# Altium PCB Sensor.PcbDoc
Units mm, origin at the board's own origin, x right, y up, seen from the top; angles counter-clockwise.
Board outline 35 x 15 mm, 4 copper layers (Top Layer 1, Top Layer 2, Bottom Layer 3, Bottom Layer 4), stack 0.603 mm thick; 64 components, 54 nets, 226 pads, 89 vias.
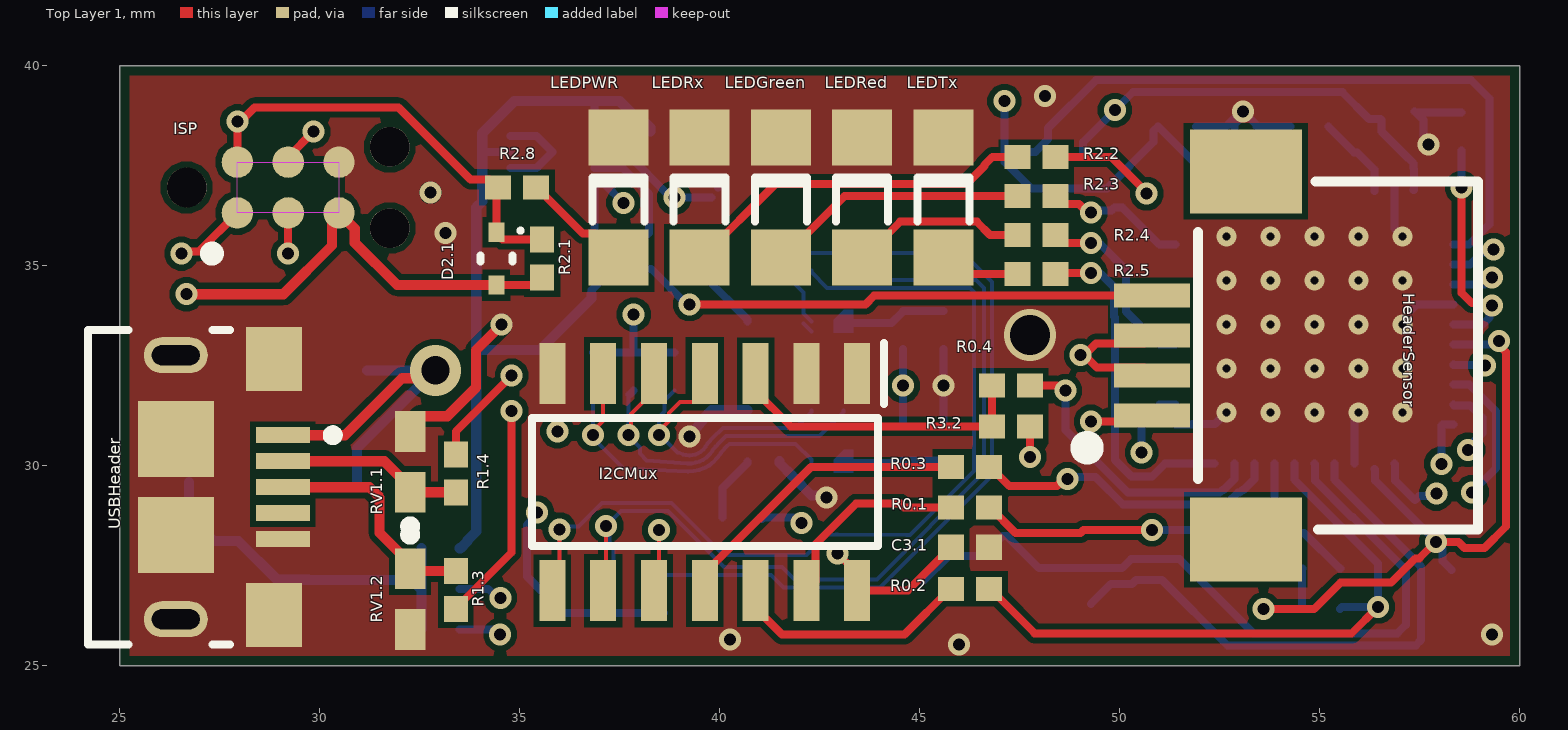
[diagram p0: Top Layer 1 view]
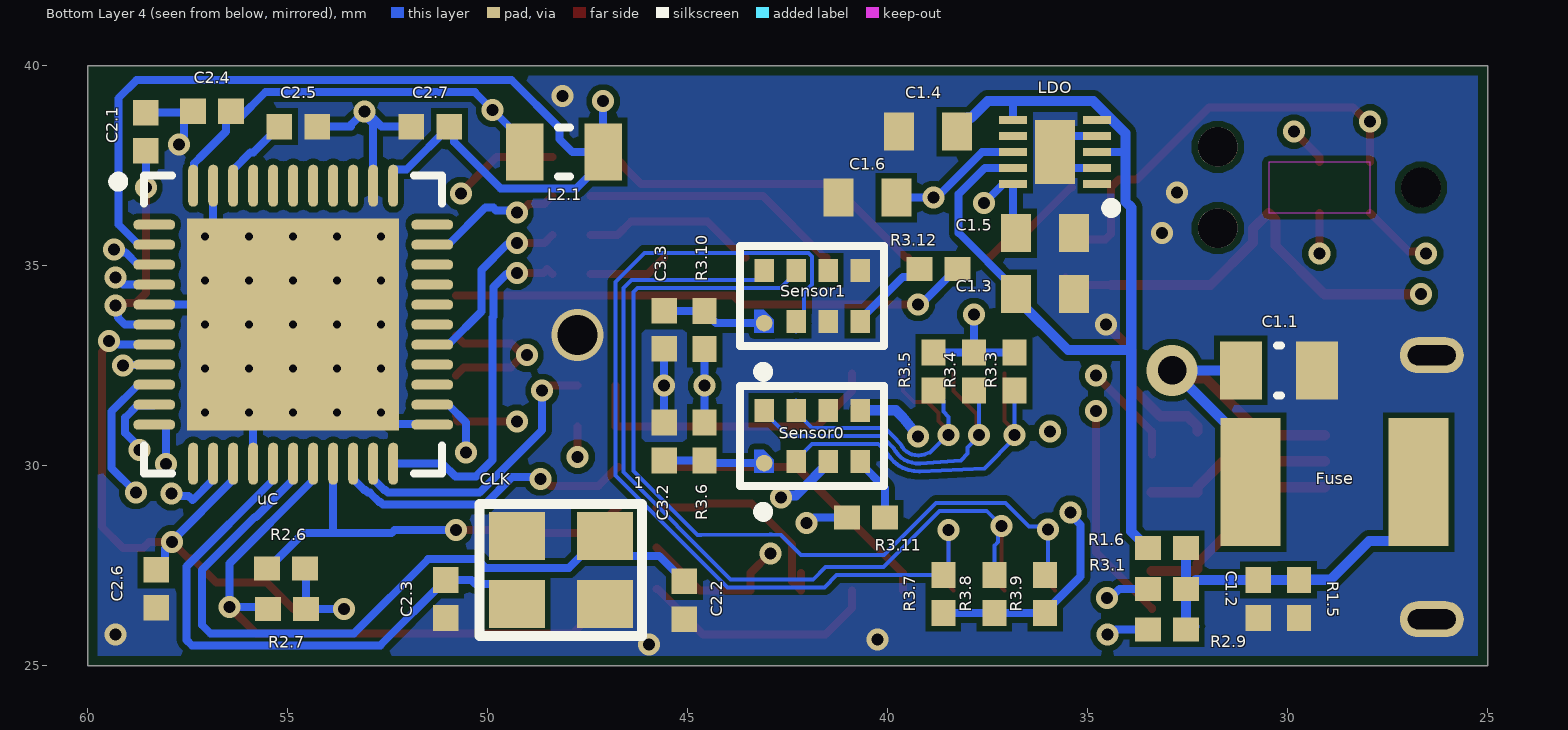
[diagram p1: Bottom Layer 4 view, seen from below]
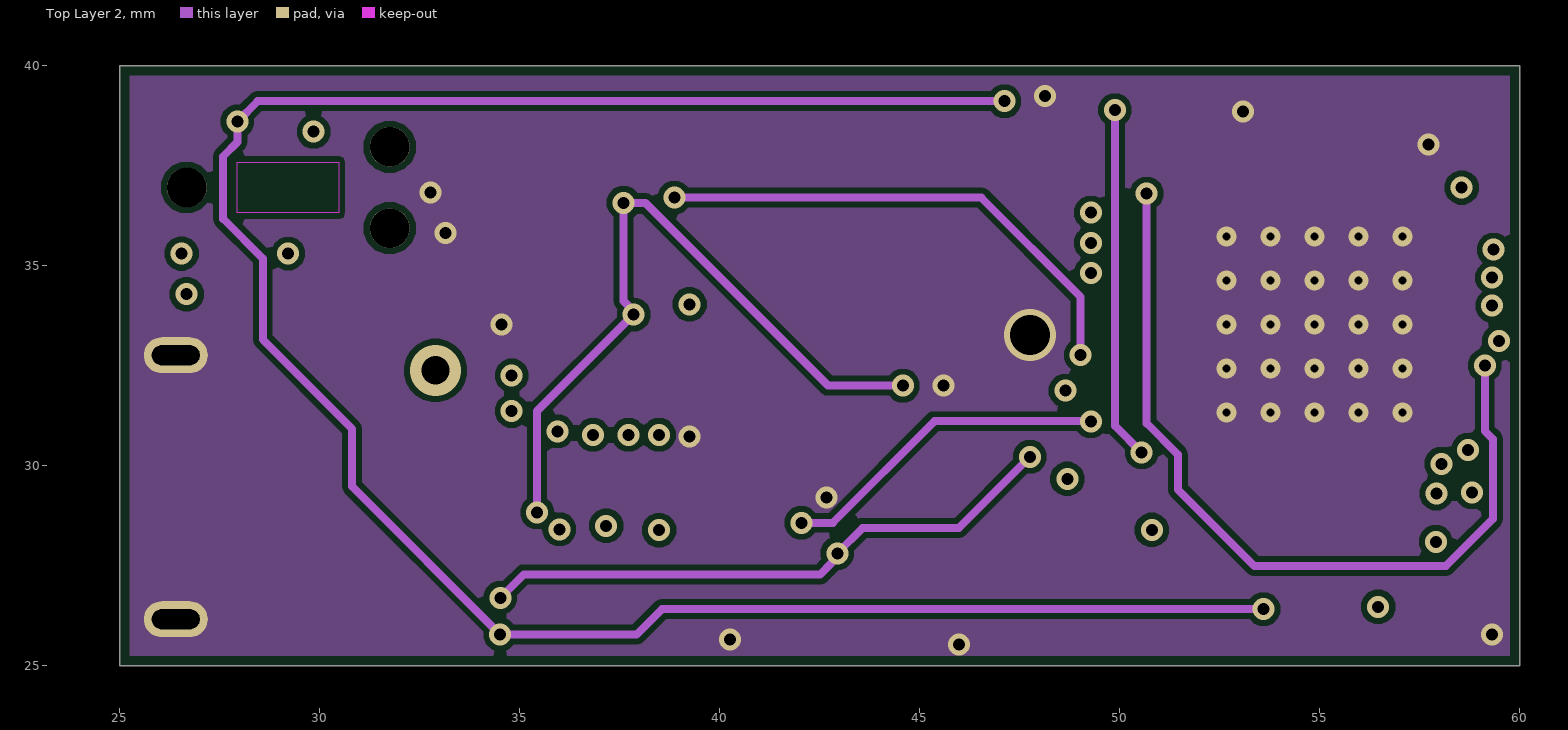
[diagram p2: Top Layer 2]
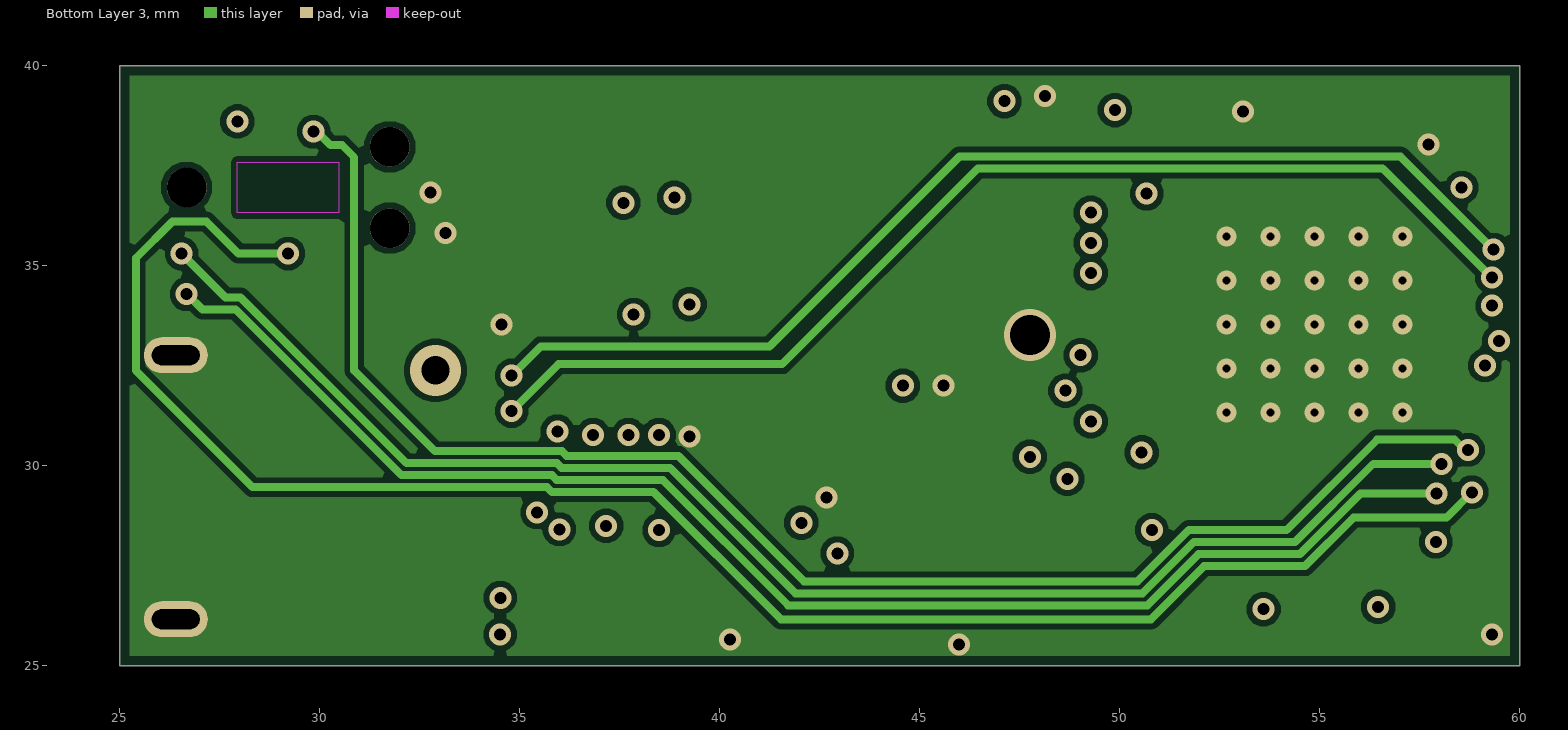
[diagram p3: Bottom Layer 3]
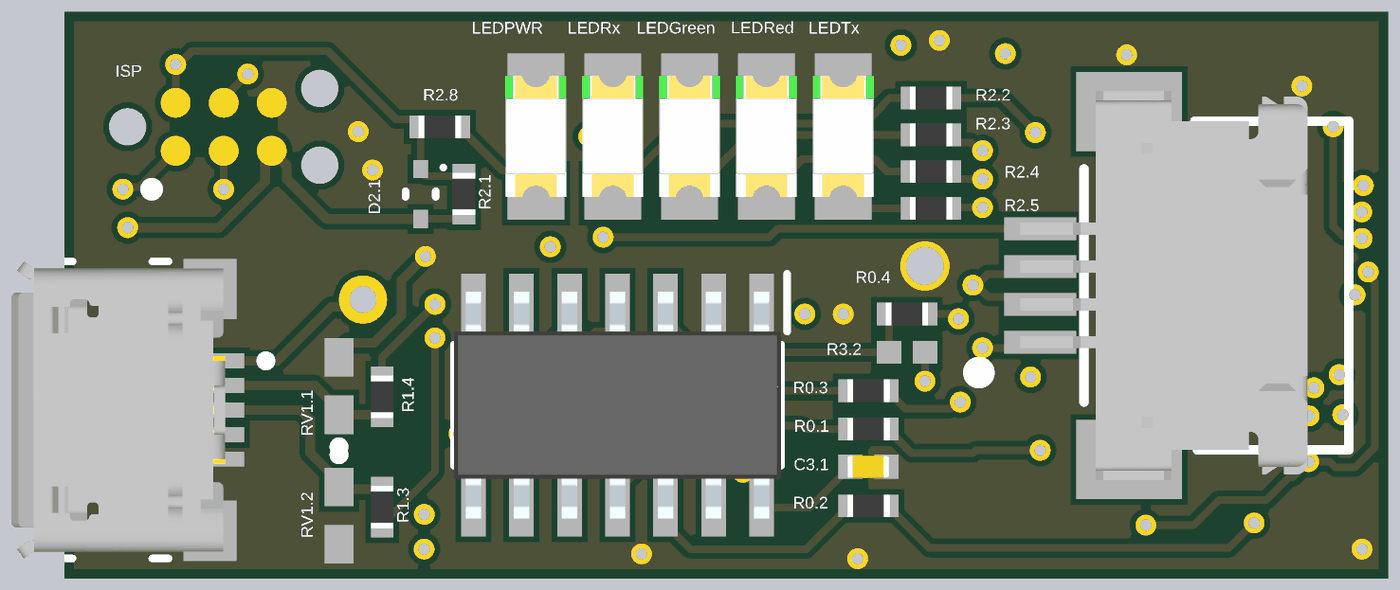
[diagram p4: 3D render of the assembled board from above, using the file's embedded part models]
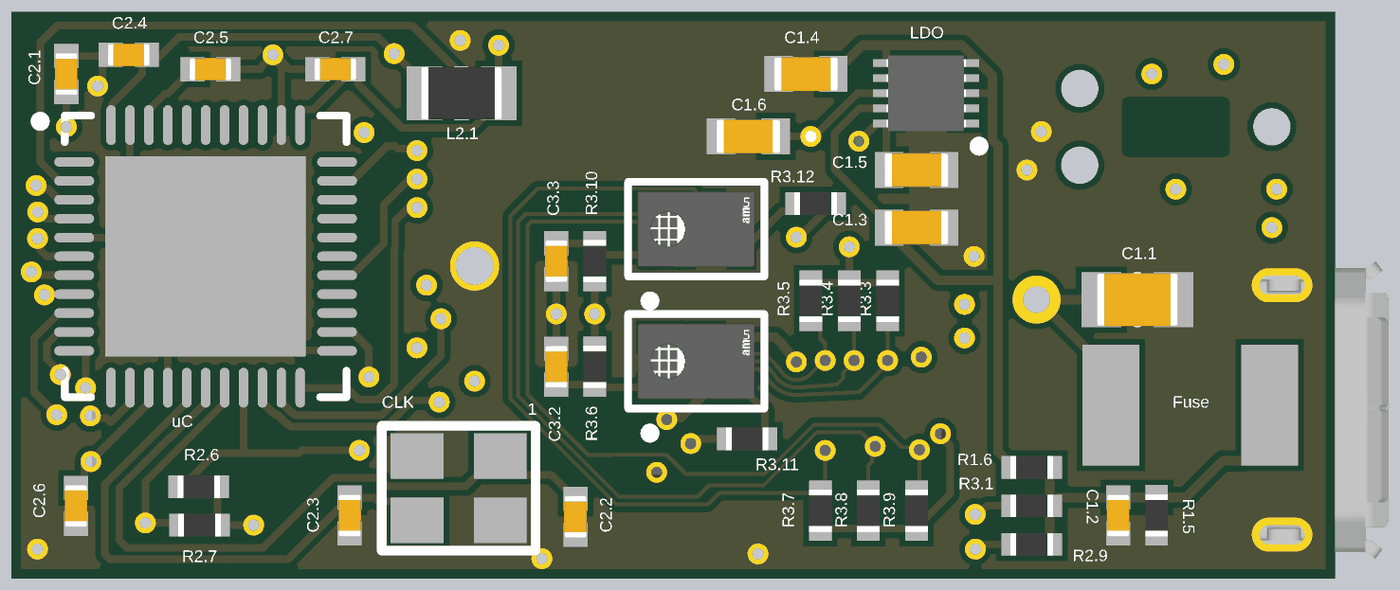
[diagram p5: 3D render of the assembled board from below, using the file's embedded part models]

## Layer stack, top to bottom
Top Solder: solder mask 0.0102, Solder Resist, Dk 3.5
Top Layer 1: signal copper 0.035
Dielectric 2: prepreg 0.0711, PP-006, Dk 4.1
Top Layer 2: signal copper 0.0356
Dielectric 1: dielectric 0.32, FR-4, Dk 4.8
Bottom Layer 3: signal copper 0.0356
Dielectric 3: prepreg 0.0711, PP-006, Dk 4.1
Bottom Layer 4: signal copper 0.035
Bottom Solder: solder mask 0.0102, Solder Resist, Dk 3.5

## Board outline
25,25 25,40 60,40 60,25

## Design rules (kind name [scope] priority, off if disabled: settings)
BoardOutlineClearance [All] p1: gap=0.25 ignorepadtopadclearanceinfootprint=FALSE except(0: Arc-SplitContinuation Track-SplitContinuation SMDPad-SplitContinuation THPad-SplitContinuation Via-SplitContinuation Fill-SplitContinuation Poly-SplitContinuation Region-SplitContinuation Text-SplitContinuation)
Clearance Clearance-xPP-xTP-xTT [All] p1: gap=0.15 ignorepadtopadclearanceinfootprint=FALSE except(0: Arc-Hole Track-Hole SMDPad-Hole THPad-Hole Via-Hole Fill-Hole Poly-Hole Region-Hole Text-Hole; 0.1: Arc-Arc Arc-Track Arc-SMDPad Arc-THPad Track-Track Track-SMDPad Track-THPad SMDPad-SMDPad SMDPad-THPad THPad-THPad)
ComponentClearance [All] p1: gap=0.25 collisioncheckmode=3 verticalgap=0.25 showdistances=FALSE
DiffPairsRouting [All] p1: maxlimit=0.25 minlimit=0.25 mostfreqgap=0.25 toplayer_minwidth=0.381 toplayer_maxwidth=0.381 toplayer_prefwidth=0.381 midlayer1_minwidth=0.381 midlayer1_maxwidth=0.381 midlayer1_prefwidth=0.381 midlayer2_minwidth=0.381 midlayer2_maxwidth=0.381 midlayer2_prefwidth=0.381 bottomlayer_minwidth=0.381 bottomlayer_maxwidth=0.381 bottomlayer_prefwidth=0.381 maxuncoupledlength=12.5
Height [All] p1: minheight=0 maxheight=25 prefheight=12.5
HoleSize HoleSize-PTH [All] p1: absolutevalues=TRUE maxlimit=2 minlimit=0.2 maxpercent=80.000 minpercent=20.000
HoleToHoleClearance [All] p1: gap=0.35 allowstackedmicrovias=TRUE
MinimumAnnularRing "Minimum IAR  >0.45mm" [((ObjectKind = 'Pad') OR (ObjectKind = 'Via')) And (Layer = 'MultiLayer') And (HoleDiameter > AsMM(0.45))] p1: minimumring=0.124 // minimum inner annular ring for pads > 0.45mm finished hole size
MinimumAnnularRing "Minimum IAR <=0.45mm" [((ObjectKind = 'Pad') OR (ObjectKind = 'Via')) And (Layer = 'MultiLayer') And (HoleDiameter <= AsMM(0.45))] p2: minimumring=0.124 // minimum inner annular ring for pads <= 0.45mm finished hole size
MinimumSolderMaskSliver [All] p1: minsoldermaskwidth=0.08
PlaneClearance PlaneClearance-IPI [All] p1: clearance=0.25
PlaneConnect [All] p1: planeconnectstyle=Direct reliefexpansion=0.175 reliefentries=4 reliefconductorwidth=0.2 reliefairgap=0.2
PolygonConnect PolygonConnect-xTW [All] p1: connectstyle=Direct reliefconductorwidth=0.2 reliefentries=4 polygonreliefangle="90 Angle" airgapwidth=0.2
RoutingCorners [All] p1: cornerstyle=45-Degree minsetback=2.5 maxsetback=2.5
RoutingVias "RoutingVias > 0.45mm" [(ObjectKind = 'Via') And (HoleDiameter > AsMM(0.45))] p1: holewidth=0.5 width=0.85 viastyle="Through Hole" minholewidth=0.5 minwidth=0.85 maxholewidth=0.9 maxwidth=1.25 // finishet hole size > 0.45mm
RoutingVias "RoutingVias <= 0.45mm" [(ObjectKind = 'Via') And (HoleDiameter <= AsMM(0.45))] p2: holewidth=0.3 width=0.65 viastyle="Through Hole" minholewidth=0.25 minwidth=0.6 maxholewidth=0.45 maxwidth=0.8 // finishet hole size <= 0.45mm
SilkToSilkClearance [All] p1: silktosilkclearance=0.2
SilkToSolderMaskClearance SilkscreenOverComponentPads [IsPad] p1: minsilkscreentomaskgap=0.2 clearancetoexposedcopper=TRUE
SolderMaskExpansion [All] p1: expansion=0 istentingtop=FALSE
UnRoutedNet [All] p1: checkbadconnections=TRUE
Width Width-xTW [All] p1: maxlimit=3 minlimit=0.1 preferedwidth=0.2 minimp=50.000000 maximp=50.000000 favimp=50.000000
18 further rules are at their usual default settings.

## Classes and differential pairs
component class U_USB: C1.1 C1.2 C1.3 C1.4 C1.5 C1.6 Fuse LDO R1.3 R1.4 R1.5 R1.6 RV1.1 RV1.2 USBHeader
component class U_Sensors: C3.1 C3.2 C3.3 HeaderSensor I2CMux R3.1 R3.2 R3.3 R3.4 R3.5 R3.6 R3.7 R3.8 R3.9 R3.10 R3.11 R3.12 Sensor0 Sensor1
component class U_ATMega32U4: C2.1 C2.2 C2.3 C2.4 C2.5 C2.6 C2.7 CLK D2.1 ISP L2.1 LEDGreen LEDPWR LEDRed LEDRx LEDTx R2.1 R2.2 R2.3 R2.4 R2.5 R2.6 R2.7 R2.8 R2.9 uC
component class Main: R0.1 R0.2 R0.3 R0.4

## Components (designator, comment, footprint, x,y, rotation, side; value= is the part's Value field where it differs from the comment)
C1.1 "0805" C0805_M 30.226,32.385 r0 bottom value=22u
C1.2 "0402" C0402_M 30.734,26.67 r90 bottom value=100n
C1.3 "0603" C0603_M 36.068,34.29 r0 bottom value=10u
C1.4 "0603" C0603_M 38.989,38.354 r180 bottom value=10u
C1.5 "0603" C0603_M 36.068,35.814 r0 bottom value=10u
C1.6 "0603" C0603_M 40.513,36.703 r180 bottom value=10u
C2.1 "0402" C0402_M 58.547,38.354 r90 bottom value=1u
C2.2 "0402" C0402_M 45.085,26.637 r90 bottom value=22p
C2.3 "0402" C0402_M 51.054,26.67 r90 bottom value=22p
C2.4 "0402" C0402_M 56.896,38.862 r180 bottom value=1u
C2.5 "0402" C0402_M 54.737,38.481 r180 bottom value=100n
C2.6 "0402" C0402_M 58.293,26.924 r90 bottom value=100n
C2.7 "0402" C0402_M 51.435,38.481 r180 bottom value=100n
C3.1 "0402" C0402_M 46.256,27.96 r180 top value=100n
C3.2 "0402" C0402_M 45.593,30.607 r90 bottom value=100n
C3.3 "0402" C0402_M 45.593,33.401 r270 bottom value=100n
CLK "7M-16.000MAAE-T" 7M-16.000MAAE-T 48.176,27.393 r0 bottom
D2.1 "NSV1SS400T1G" ONSC-SOD-523-2-502-01_V 34.417,35.179 r270 top
Fuse "MF-MSMF050-2" BOUR-MF-MSMF050-2_V 28.829,29.591 r180 bottom
HeaderSensor "52207-0433" 52207-0433 50.8,32.758 r90 top
I2CMux "" SOIC127P600X175-14N 39.624,29.591 r270 top
ISP "" TAG_TC2030-IDC-NL 29.21,36.957 r0 top
L2.1 "MH2029-300Y" L0805_M 48.097,37.846 r180 bottom value=100n
LDO "TLV751180330PDSQR" SON40P200X200X80-11N 35.814,37.846 r0 bottom
LEDGreen "150120GS75000" 1206_A 41.529,36.703 r270 top
LEDPWR "150120BS75000" 1206_A 37.465,36.703 r270 top
LEDRed "150120RS75000" 1206_A 43.561,36.703 r270 top
LEDRx "150120YS75000" 1206_A 39.497,36.703 r270 top
LEDTx "150120YS75000" 1206_A 45.593,36.703 r270 top
R0.1 "0402" R0402_M 46.261,28.956 r180 top value=0R
R0.2 "0402" R0402_M 46.261,26.924 r180 top value=0R
R0.3 "0402" R0402_M 46.261,29.972 r180 top value=0R
R0.4 "0402" R0402_M 47.277,32.004 r180 top value=0R
R1.3 "0402" R0402_M 33.401,26.891 r270 top value=22R
R1.4 "0402" R0402_M 33.401,29.812 r90 top value=22R
R1.5 "0402" R0402_M 29.718,26.675 r90 bottom value=10k
R1.6 "0402" R0402_M 33.02,27.94 r180 bottom value=0R
R2.1 "0402" R0402_M 35.56,35.179 r90 top value=10k
R2.2 "0402" R0402_M 47.912,37.719 r180 top value=1k
R2.3 "0402" R0402_M 47.912,36.745 r0 top value=1k
R2.4 "0402" R0402_M 47.912,35.772 r0 top value=1k
R2.5 "0402" R0402_M 47.912,34.798 r0 top value=1k
R2.6 "0402" R0402_M 55.047,27.432 r180 bottom value=4K7
R2.7 "0402" R0402_M 55.024,26.416 r180 bottom value=4K7
R2.8 "0402" R0402_M 34.925,36.957 r180 top value=1k
R2.9 "0402" R0402_M 33.02,25.908 r180 bottom value=0R
R3.1 "0402" R0402_M 33.02,26.924 r0 bottom value=0R
R3.2 "0402" R0402_M_open 47.277,30.988 r180 top value=0R
R3.3 "0402" R0402_M 36.83,32.352 r90 bottom value=2k2
R3.4 "0402" R0402_M 37.846,32.352 r90 bottom value=2k2
R3.5 "0402" R0402_M 38.862,32.352 r90 bottom value=2k2
R3.6 "0402" R0402_M 44.577,30.607 r270 bottom value=0R
R3.7 "0402" R0402_M 38.608,26.797 r270 bottom value=2k2
R3.8 "0402" R0402_M 37.338,26.797 r270 bottom value=2k2
R3.9 "0402" R0402_M 36.068,26.797 r270 bottom value=2k2
R3.10 "0402" R0402_M 44.577,33.401 r90 bottom value=0R
R3.11 "0402" R0402_M 40.546,28.702 r180 bottom value=10R
R3.12 "0402" R0402_M 38.735,34.925 r180 bottom value=10R
RV1.1 "CG0603MLC-05E" BOUR-CG0603-2_V 32.258,30.097 r90 top
RV1.2 "CG0603MLC-05E" BOUR-CG0603-2_V 32.258,26.668 r270 top
Sensor0 "AS7341-DLGM" FP-AS7341-DLGM-MFG 41.891,30.75 r90 bottom
Sensor1 "AS7341-DLGM" FP-AS7341-DLGM-MFG 41.891,34.25 r90 bottom
uC "ATmega32U4-MU" 44PW_M 54.864,33.528 r180 bottom
USBHeader "10118193-0001LF" FCI-10118193-0001LF-5_V 27.75,29.464 r270 top

## Footprints (in the part's own frame and the unit in brackets; to place one, negate y for a bottom-side part, rotate by r counter-clockwise, add the part's x,y. Pads: shape width x height; smd on the part's side, far side on the other; paste and mask are expansions set on the pad)
7M-16.000MAAE-T [mm]
  rect 1.4x1.2 smd: 1(-1.1,-0.85) 2(1.1,-0.85) 3(1.1,0.85) 4(-1.1,0.85)
  silkscreen extent -2.03,-1.65 2.03,1.65
44PW_M [mm] "QFN, 44-Leads, Body 7x7mm, Pitch 0.5mm, Thermal Pad 5.3x5.3mm, IPC Low Density"
  oval 1.05x0.25 smd: 1(-3.475,2.5) 2(-3.475,2) 3(-3.475,1.5) 4(-3.475,1) 5(-3.475,0.5) 6(-3.475,0) 7(-3.475,-0.5) 8(-3.475,-1) 9(-3.475,-1.5) 10(-3.475,-2) 11(-3.475,-2.5) 23(3.475,-2.5) 24(3.475,-2) 25(3.475,-1.5) 26(3.475,-1) 27(3.475,-0.5) 28(3.475,0) 29(3.475,0.5) 30(3.475,1) 31(3.475,1.5) 32(3.475,2) 33(3.475,2.5)
  oval 0.25x1.05 smd: 12(-2.5,-3.475) 13(-2,-3.475) 14(-1.5,-3.475) 15(-1,-3.475) 16(-0.5,-3.475) 17(0,-3.475) 18(0.5,-3.475) 19(1,-3.475) 20(1.5,-3.475) 21(2,-3.475) 22(2.5,-3.475) 34(2.5,3.475) 35(2,3.475) 36(1.5,3.475) 37(1,3.475) 38(0.5,3.475) 39(0,3.475) 40(-0.5,3.475) 41(-1,3.475) 42(-1.5,3.475) 43(-2,3.475) 44(-2.5,3.475)
  rect 5.3x5.3 smd: 45(0,0)
  silkscreen extent -4.5,-3.73 3.73,3.73, body extent -3.57,-3.58 3.58,3.57, height 0.9
1206_A [mm] "Chip LED, 2-Leads, Body 3.2x1.6mm, IPC Medium Density"
  rect 1.4x1.5 smd: 1(-1.5,0) 2(1.5,0)
  silkscreen extent -0.5,-0.66 0.6,0.65, body extent -1.6,-0.8 1.6,0.8, height 0.68
52207-0433 [mm]
  rect 0.6x1.9 smd: 1(-1.5,0) 2(-0.5,0) 3(0.5,0) 4(1.5,0)
  rect 2.1x2.8 smd: 5(-4.605,-2.35) 6(4.605,-2.35)
  silkscreen extent -4.35,-8.16 4.35,1.79, body extent -5.15,-7.07 5.15,0.53, height 2.7
BOUR-CG0603-2_V [mm] "SMD, 2-Leads, Body 1.6x0.8mm, Pitch 1.52mm"
  rect 1.02x0.76 smd: 1(-0.76,0) 2(0.76,0)
  silkscreen extent -1.94,-0.13 -1.7,0.12, body extent -0.8,-0.4 0.8,0.4, height 0.55
BOUR-MF-MSMF050-2_V [mm] "SMD, 2-Leads, Body 4.55x3.24mm"
  rect 1.5x3.2 smd: 1(-2.1,0) 2(2.1,0)
  body extent -2.28,-1.62 2.28,1.62, height 0.85
C0402_M [mm] "Cap 0402(M1005) Medium Density"
  rect 0.64x0.64 smd: 1(-0.475,0) 2(0.475,0)
  body extent -0.56,-0.3 0.56,0.3, height 0.56
C0603_M [mm] "Cap 0603(M1608) Medium Density"
  rect 0.75x0.95 smd: 1(-0.725,0) 2(0.725,0)
  body extent -0.85,-0.45 0.85,0.45, height 0.86
C0805_M [mm] "Cap 0805(M2012) Medium Density"
  rect 1.05x1.45 smd: 1(-0.95,0) 2(0.95,0)
  silkscreen extent -0.05,-0.62 0.05,0.63, body extent -1.07,-0.7 1.08,0.7, height 1.4
FCI-10118193-0001LF-5_V [mm] "Micro, USB-B, 5-Leads, Body 7.86x5.05mm, Pitch 0.65 mm"
  rect 0.4x1.35 smd: 1(-1.3,1.325) 2(-0.65,1.325) 3(0,1.325) 4(0.65,1.325) 5(1.3,1.325)
  rect 1.6x1.4 smd: 6(-3.2,1.1) 7(3.2,1.1)
  rect 1.9x1.9 smd: 8(-1.2,-1.35) 9(1.2,-1.35)
  oval 0.9x1.6 hole 0.5 slot 1.2 at 90 deg: 10(-3.3,-1.35) 11(3.3,-1.35)
  silkscreen extent -3.93,-3.55 3.93,2.7, body extent -3.93,-4.16 3.93,1.5, height 2.83
FP-AS7341-DLGM-MFG [mm]
  round 0.414 smd paste+0 mask+0: 1(-0.681,1.2)
  rect 0.575x0.488 smd paste+0 mask+0: 2(-0.638,0.4) 3(-0.638,-0.4) 4(-0.638,-1.2) 5(0.638,-1.2) 6(0.638,-0.4) 7(0.638,0.4) 8(0.638,1.2)
  Top Layer 1 region: -0.925,1.444 -0.35,1.444 -0.35,1.206 -0.6,0.956 -0.925,0.956 -0.925,1.444
  silkscreen extent -2.02,-1.8 1.25,1.8, body extent -1,-1.55 1,1.55, height 2
L0805_M [mm] "Inductor 0805(M2012) Medium Density"
  rect 0.94x1.43 smd: 1(-0.98,0) 2(0.98,0)
  silkscreen extent -0.15,-0.61 0.15,0.61, body extent -1.07,-0.7 1.08,0.7, height 0.6
ONSC-SOD-523-2-502-01_V [mm] "SOD, 2-Leads, Body 1.2x0.8mm"
  rect 0.48x0.4 smd: 1(-0.66,0) 2(0.66,0)
  silkscreen extent -0.75,-0.4 0.07,0.65, body extent -0.6,-0.4 0.6,0.4, height 0.7
R0402_M [mm] "Res 0402(M1005) Medium Density"
  rect 0.65x0.6 smd: 1(-0.475,0) 2(0.475,0)
  body extent -0.56,-0.3 0.56,0.3, height 0.35
R0402_M_open [mm] "Res 0402(M1005) Open Medium Density"
  rect 0.65x0.6 smd: 1(-0.475,0) 2(0.475,0)
  body extent -0.56,-0.3 0.56,0.3, height 0.35
SOIC127P600X175-14N [mm]
  rect 1.525x0.65 smd: 1(-2.712,3.81) 2(-2.712,2.54) 3(-2.712,1.27) 4(-2.712,0) 5(-2.712,-1.27) 6(-2.712,-2.54) 7(-2.712,-3.81) 8(2.712,-3.81) 9(2.712,-2.54) 10(2.712,-1.27) 11(2.712,0) 12(2.712,1.27) 13(2.712,2.54) 14(2.712,3.81)
  silkscreen extent -3.47,-4.33 1.6,4.48, body extent -3,-4.33 3,4.33, height 1.75
SON40P200X200X80-11N [mm]
  rect 0.7x0.2 smd: 1(-1.05,0.8) 2(-1.05,0.4) 3(-1.05,0) 4(-1.05,-0.4) 5(-1.05,-0.8) 6(1.05,-0.8) 7(1.05,-0.4) 8(1.05,0) 9(1.05,0.4) 10(1.05,0.8)
  rect 1x1.6 smd: 11(0,0)
  silkscreen extent -1.52,1.28 -1.27,1.52, body extent -1.05,-1 1.05,1, height 0.8
TAG_TC2030-IDC-NL [mil]
  round 30.98 smd paste-39.37: 1(-50,-25) 2(-50,25) 3(0,-25) 4(0,25) 5(50,-25) 6(50,25)
  round 39.02 hole 39.02 unplated: ""(-100,0) ""(100,-40) ""(100,40)
  Keep-Out Layer region: 50,-25.03 -50.06,-25.03 -50.06,25 50,25
  Keep-Out Layer region: 50,-25.03 -50.05,-25.03 -50.05,25 50,25
  silkscreen extent -81,-71 -69,-59

## Part data
C1.1: library part C0805_X5R_22u_20%, "Capacitor", Manufactor=Walsin, ManufactorPartNumber=0805X226M6R3CT, Supplier Part Number 1=2497053, TempRating="-55°C to +125°C", Tolerance=20%, VoltageRating=6.3V, Part Number=C0805_X5R_22u_20%, Supplier 1=Farnell, Tech="MLCC X5R", Type=Capacitor
C1.2 C2.5 C2.6 C2.7: library part C0402_X7R_100n_10%, "Capacitor", Manufactor=Yageo, ManufactorPartNumber=CC0402KRX7R7BB104, Supplier Part Number 1=9402047, TempRating="-55°C to +125°C", Tolerance=10%, VoltageRating=16V, Part Number=C0402_X7R_100n_10%, Supplier 1=Farnell, Tech="MLCC X7R", Type=Capacitor
C1.3 C1.4 C1.5 C1.6: library part C0603_X5R_10u_10%, "Capacitor", Manufactor=Yageo, ManufactorPartNumber=CC0603MRX5R5BB106, Supplier Part Number 1=1458902, TempRating="-55°C to +85°C", Tolerance=10%, VoltageRating=6,3V, Part Number=C0603_X5R_10u_10%, Supplier 1=Farnell, Tech="MLCC X5R", Type=Capacitor
C2.1 C2.4: library part C0402_X5R_1u_10V_WE, "Capacitor", Manufactor="WURTH ELEKTRONIK", ManufactorPartNumber=885012105012, Supplier Part Number 1=732-7489-1-ND, TempRating="-55°C to +125°C", Tolerance=±20%, VoltageRating=10V, Part Number=C0402_X5R_1u_10V_WE, Supplier 1=Digi-Key, Tech=X5R, Type=Capacitor
C2.2 C2.3: library part C0402_NP0_22p_50V_WE, "Capacitor", Manufactor="WURTH ELEKTRONIK", ManufactorPartNumber=885012005057, Supplier Part Number 1=732-7471-1-ND, TempRating="-55°C to +125°C", Tolerance=±5%, VoltageRating=50V, Part Number=C0402_NP0_22p_50V_WE, Supplier 1=Digi-Key, Tech=NP0, Type=Capacitor
C3.1 C3.2 C3.3: library part C0402_X5R_100n_10%, "Capacitor", Manufactor=Yageo, ManufactorPartNumber=CC0402KRX5R7BB104, Supplier Part Number 1=1816750, TempRating="-55°C to +85°C", Tolerance=10%, VoltageRating=16V, Part Number=C0402_X5R_100n_10%, Supplier 1=Farnell, Supplier 2=Digi-Key, Supplier Part Number 2=311-1347-1-ND, Tech="MLCC X5R", Type=Capacitor
D2.1: library part CMP-1054-00078-1, "High-Speed Switching Diode, 2-Pin SOD-523, Pb-Free, Tape and Reel", Manufacturer="On Semiconductor", ComponentLink1Description="Manufacturer URL", ComponentLink1URL=http://www.onsemi.com/, ComponentLink2Description=Datasheet, ComponentLink2URL=http://www.onsemi.com/pub_link/Collateral/1SS400T1-D.PDF, ComponentLink3Description="Package Specification", ComponentLink3URL=http://www.onsemi.com/pub_link/Collateral/502-01.PDF, Configuration=Single, DatasheetVersion="Rev. 7", IF Max (A)=0.2, Mounting Technology="Surface Mount", PackageDescription="2-Pin SOD, Body 1.2 x 0.8 mm", PackageReference=SOD-523-2-502-01, PackageVersion="Rev. E, 09/2010", Packing="Tape and Reel", PartNumber=NSV1SS400T1G, RoHS=TRUE, trr Max (ns)=4
Fuse: library part CMP-2100-03653-1, "PTC Resettable Fuse, 15 V, 500 mA, -40 to 85 degC, 2-Pin SMD, RoHS, Tape and Reel", Case Code (Imperial)=1812, Case Code (Metric)=4532, Current Rating=100A, Manufacturer=Bourns, Max Operating Temperature=85degC, Min Operating Temperature=-40degC, Package Description="2-Pin Surface Mount Device, Body 4.55 x 3.24 mm", Package Quantity=2000, Power Dissipation=800mW, Resistance=150mOhm, Supply Voltage=15V, Case/Package=1812, Contact Plating=Gold, Datasheet URL=http://www.bourns.com/docs/Product-Datasheets/mfmsmf.pdf, Datasheet Version="Rev. AG, 08/2016", Height=0.85mm, Lead Free=LeadFree, Length=4.73mm, Manufacturer URL=http://www.bourns.com/, Max Current Rating=100A, Mount=SurfaceMount, Number of Terminals=2, Package Reference=MF-MSMF050-2, Packaging=TapeandReel, Radiation Hardening=No, REACH SVHC=NoSVHC, RoHSCompliant=true, Termination=SMD/SMT, Voltage Rating=15V, Voltage Rating (DC)=15V, Width=3.41mm
HeaderSensor: "Connector", Manufacturer_Name=Molex, Mouser Part Number=538-52207-0433, Datasheet Link=http://www.molex.com/pdm_docs/sd/522072033_sd.pdf, Manufacturer_Part_Number=52207-0433, Mouser Price/Stock=https://www.mouser.co.uk/ProductDetail/Molex/52207-0433?qs=rw2VfpiI%2FsN5C%252BrnOc9sng%3D%3D
I2CMux: library part TCA9543ADR, "Integrated Circuit", Manufacturer_Name="Texas Instruments", Mouser Part Number=595-TCA9543ADR, Arrow Part Number=TCA9543ADR, Arrow Price/Stock=https://www.arrow.com/en/products/tca9543adr/texas-instruments, Datasheet Link=http://www.ti.com/lit/gpn/tca9543a, Height=1.75mm, Manufacturer_Part_Number=TCA9543ADR, Mouser Price/Stock=https://www.mouser.co.uk/ProductDetail/Texas-Instruments/TCA9543ADR/?qs=WuTGPxIYnC6YhvyolILbYg%3D%3D
ISP: library part TC2030-IDC-NL, "6-PIN PLUG-OF-NAILS CABLE 6", Package="Package Analog Devices", Availability=Unavailable, MF=Tag-Connect, MP=TC2030-IDC-NL, Price=None, SnapEDA_Link=https://www.snapeda.com/parts/TC2030-IDC-NL/Tag-Connect/view-part/2783029/?ref=snap
L2.1: library part L0805_100n_2%, CurrentRating=400mA, Manufactor=Coilcraft, ManufactorPartNumber=0805CS-101XJLC, Supplier Part Number 1=2286419, TempRating="-40°C bis 125°C", Tolerance=2%, Kind=General, Part Number=L0805_100n_2%, Supplier 1=Farnell
LDO: "Integrated Circuit", Manufacturer_Name="Texas Instruments", Mouser Part Number=595-LV751180330PDSQR, Arrow Part Number=TLV751180330PDSQR, Arrow Price/Stock=https://www.arrow.com/en/products/tlv751180330pdsqr/texas-instruments, Datasheet Link=https://www.arrow.com/en/products/tlv751180330pdsqr/texas-instruments, Height=0.8mm, Manufacturer_Part_Number=TLV751180330PDSQR, Mouser Price/Stock=https://www.mouser.co.uk/ProductDetail/Texas-Instruments/TLV751180330PDSQR/?qs=TiOZkKH1s2TTHzmF98psZw%3D%3D
LEDGreen: library part CMP-1426-00014-1, "SMD mono-color Chip LED, WL-SMCW, Green", Color=Green, Manufacturer="Wuerth Elektronik", ComponentLink1Description="Manufacturer URL", ComponentLink1URL=http://www.we-online.com, ComponentLink2Description=Datasheet, ComponentLink2URL=http://katalog.we-online.com/led/datasheet/150120GS75000.pdf, PackageReference=1206_A, PartNumber=150120GS75000
LEDPWR: library part CMP-1426-00015-1, "SMD mono-color Chip LED, WL-SMCW, Blue", Color=Blue, Manufacturer="Wuerth Elektronik", ComponentLink1Description="Manufacturer URL", ComponentLink1URL=http://www.we-online.com, ComponentLink2Description=Datasheet, ComponentLink2URL=http://katalog.we-online.com/led/datasheet/150120BS75000.pdf, PackageReference=1206_A, PartNumber=150120BS75000
LEDRed: library part CMP-1426-00013-1, "SMD mono-color Chip LED, WL-SMCW, Red", Color=Red, Manufacturer="Wuerth Elektronik", ComponentLink1Description="Manufacturer URL", ComponentLink1URL=http://www.we-online.com, ComponentLink2Description=Datasheet, ComponentLink2URL=http://katalog.we-online.com/led/datasheet/150120RS75000.pdf, PackageReference=1206_A, PartNumber=150120RS75000
LEDRx LEDTx: library part CMP-1426-00019-1, "SMD mono-color Chip LED, WL-SMCW, Yellow", Color=Yellow, Manufacturer="Wuerth Elektronik", ComponentLink1Description="Manufacturer URL", ComponentLink1URL=http://www.we-online.com, ComponentLink2Description=Datasheet, ComponentLink2URL=http://katalog.we-online.com/led/datasheet/150120YS75000.pdf, PackageReference=1206_A, PartNumber=150120YS75000
R0.1 R0.2 R0.3 R0.4 R1.6 R2.9 R3.1: library part R0402_1%_0R, "Resistor", Manufactor=Multicomp, ManufactorPartNumber=MC00625W040210R, PowerRating=0,0625W, Supplier Part Number 1=1357983, Tolerance=1%, VoltageRating=50V, Part Number=R0402_1%_0R, Supplier 1=Farnell, Tech=Dickschicht, Type=Resistor
R1.3 R1.4: library part R0402_1%_220R, "Resistor", Manufactor=Vishay, ManufactorPartNumber=CRCW0402220RFKEDHP, PowerRating=0,125W, Tolerance=1%, VoltageRating=50V, Part Number=R0402_1%_220R, Tech=Dickschicht, Type=Resistor
R1.5 R2.1: library part R0402_1%_10k, "Resistor", Manufactor=Vishay, ManufactorPartNumber=CRCW040210K0FKEDHP, PowerRating=0,125W, Supplier Part Number 1=541-10.0KYCT-ND, Tolerance=1%, VoltageRating=50V, Part Number=R0402_1%_10k, Supplier 1=Digi-Key, Supplier 2=Farnell, Supplier Part Number 2=1738864, Tech=Dickschicht, Type=Resistor
R2.2 R2.3 R2.4 R2.5 R2.8: library part R0402_1%_1k, "Resistor", Manufactor=Vishay, ManufactorPartNumber=CRCW04021K00FKED, PowerRating=0,063W, Supplier Part Number 1=541-1.00KLCT-ND, Tolerance=1%, VoltageRating=50V, Part Number=R0402_1%_1k, Supplier 1=Digi-Key, Supplier 2=Farnell, Supplier Part Number 2=1469662, Tech=Dickschicht, Type=Resistor
R2.6 R2.7: library part R0402_1%_3k3, "Resistor", Manufactor=Yageo, ManufactorPartNumber=RC0402FR-073K3L, PowerRating=0,0625W, Tolerance=1%, VoltageRating=50V, Part Number=R0402_1%_3k3, Tech=Dickschicht, Type=Resistor
R3.2: library part Res0402open, "Resistor", Part Number=Res0402open, Type=Resistor
R3.3 R3.4 R3.5 R3.7 R3.8 R3.9: library part R0402_1%_1k, "Resistor", Manufactor=Vishay, ManufactorPartNumber=CRCW04021K00FKED, PowerRating=0,063W, Tolerance=1%, VoltageRating=50V, Part Number=R0402_1%_1k, Tech=Dickschicht, Type=Resistor
R3.6 R3.10: library part R0402_0R, "Resistor", Manufactor=Yageo, ManufactorPartNumber=RC0402JR-070RL, PowerRating=0,0625W, Supplier Part Number 1=311-0.0JRCT-ND, Tolerance=1%, VoltageRating=50V, Part Number=R0402_0R, Supplier 1=Digi-Key, Tech=Dickschicht, Type=Resistor
R3.11 R3.12: library part R0402_1%_100R, "Resistor", Manufactor=Vishay, ManufactorPartNumber=CRCW0402100RFKEDHP, PowerRating=0,125W, Tolerance=1%, VoltageRating=50V, Part Number=R0402_1%_100R, Tech=Dickschicht, Type=Resistor
RV1.1 RV1.2: library part CMP-0584-00001-2, "ESD Protector, 5 V Supply, -40 to 85 degC, 1.6 x 0.8 x 0.55 mm SMD, RoHS, Tape and Reel", Manufacturer=Bourns, Operating Temperature="-40 to 85 degC", CO="0.5 pF", ComponentLink1Description="Manufacturer URL", ComponentLink1URL=http://www.bourns.com/, ComponentLink2Description=Datasheet, ComponentLink2URL=http://www.bourns.com/data/global/pdfs/MLC.pdf, DatasheetVersion="Rev. S", Mounting Technology="Surface Mount", PackageDescription="2-Pin SMD, Body 1.6 x 0.8 mm, Pitch 1.52 mm", PackageReference=CG0603-2, Packing="Tape and Reel", PartNumber=CG0603MLC-05E, RoHS=TRUE, RT="1 ns", VC="20 V", VDC="5 V", VT="150 V"
Sensor0 Sensor1: library part CMP-22831-000004-1, "SENSOR AMBIENT LIGHT"
uC: library part CMP-0095-00166-2, "8-bit AVR Microcontroller, 2.7-5.5V, 16MHz, 32KB Flash, 1KB EEPROM, 2.5KB SRAM, USB Controller, 44-pin QFN, Industrial Grade (-40°C to 85°C), Ext Osc", Code_JEDEC=MO-220-VKKD-1, ComponentLink1Description="Manufacturer URL", ComponentLink1URL=http://www.atmel.com/, ComponentLink2Description="ATmega16U4/32U4 Datasheet", ComponentLink2URL=http://www.atmel.com/dyn/resources/prod_documents/doc7766.pdf, ComponentLink3Description="ATmega16U4 ATmega32U4 Summary", ComponentLink3URL=http://www.atmel.com/dyn/resources/prod_documents/7766S.pdf, DatasheetVersion="revF, Nov-2010", PackageDescription="44-Pin Quad Flat No-Lead Package, 7 x 7 mm Body, 0.5 mm Pitch (QFN)", PackageReference=44PW, PackageVersion="revG, Sep-2009", RevisionNote="DatasheetVersion, PackageVersion & PCB updated. URLs added."
USBHeader: library part CMP-2000-05119-1, "Micro USB B Type Receptacle, -55 to 85 degC, 5-Pin SMD, RoHS, Tape and Reel", Color=Black, Current Rating=1.8A, Flammability Rating=UL94V-0, Insulation Resistance=1000MOhms, Manufacturer=FCI, Operating Temperature Range=-55Cto+85C, Brand=FCI, Connector Type=MicroUSBTypeBreceptacle, Contact Material=CopperAlloy, Contact Plating=Gold, Datasheet URL=http://datasheet.octopart.com/10118193-0001LF-FCI-datasheet-55953155.pdf, Datasheet Version="Rev. C, 05/2015", Factory Pack Quantity=1200, Gender=Female, Manufacturer URL=http://www.fci.com/, Mounting Angle=Right, Number of Contacts=5Contact, Packaging=Reel, Product=MicroUSBTypeBConnectors, Product Category=USBConnectors, RoHS=Details, Standard=USB2.0, Termination Style=SMD/SMT

## Via types
v1: diameter 0.55, hole 0.3, Top Layer 1 to Bottom Layer 4, 62 vias
v2: diameter 0.5, hole 0.2, Top Layer 1 to Bottom Layer 4, 25 vias
v3: diameter 1.3, hole 1, Top Layer 1 to Bottom Layer 4, 1 vias
v4: diameter 1.27, hole 0.711, Top Layer 1 to Bottom Layer 4, 1 vias

## Nets (pads, with @x,y where several pads share a name; then routed paths per layer and width w, separated by ;. In a path a pad name is that pad's centre, name@x,y a point inside that pad or via, vN(x,y) a via of type N, cw(c..) or ccw(c..) an arc to the next point about the centre after c; other vN are vias at no path point)
GND: C1.1.1 C1.2.1 C1.3.1 C1.4.1 C1.5.1 C1.6.1 C2.1.2 C2.2.1 C2.3.1 C2.4.1 C2.5.2 C2.6.1 C2.7.1 C3.1.1 C3.2.2 C3.3.2 CLK.2 CLK.4 I2CMux.1 I2CMux.2 I2CMux.7 ISP.6 LDO.2 LDO.4 LDO.11 LEDGreen.1 LEDPWR.1 LEDRed.1 LEDRx.1 LEDTx.1 R1.5.1 RV1.1.2 RV1.2.2 Sensor0.3 Sensor0.5 Sensor1.3 Sensor1.5 uC.5 uC.15 uC.23 uC.35 uC.43 uC.45 USBHeader.5 USBHeader.6 USBHeader.7 USBHeader.8 USBHeader.9 USBHeader.10 USBHeader.11 | length 24
  Top Layer 1 w0.254: RV1.1.2 32.258,30.987 32.511,31.24 33.185,31.24 33.909,31.964 33.909,32.893 v1(34.544,33.528)
  Bottom Layer 4 w0.2: LDO.2 35.414,37.446 LDO.11 35.414,38.246 LDO.4 ; C3.2.2 v1(45.593,32.004) C3.3.2 ; uC.23 51.803,31.028 51.818,31.043 52.379,31.043 v2(52.664,31.328) ; C2.7.1 52.654,38.481 53.035,38.862 v1(53.086,38.862) ; uC.35 52.864,38.545 53.086,38.767 v1(53.086,38.862) ; C2.5.2 53.421,38.481 53.421,38.527 v1(53.086,38.862) ; uC.15 55.864,31.228 v2(55.964,31.328) ; uC.43 56.864,35.928 v2(57.064,35.728) ; v2(57.064,33.528) 57.064,33.678 57.414,34.028 uC.5 ; C2.4.1 C2.4.1@57.404,38.829 ; v1(57.721,38.036) 57.721,38.117 57.591,38.246 57.591,38.642 C2.4.1@57.404,38.829 ; C2.1.2 C2.4.1@57.404,38.829
  Bottom Layer 4 w0.254: v1(39.243,30.734) 39.65,31.239 39.799,31.388 Sensor0.5 ; Sensor0.3 41.491,30.069 41.82,29.74 41.82,29.73 42.293,29.257 42.625,29.257 v1(42.672,29.21)
  other v1: 45.974,25.527 40.259,25.654 59.309,25.781 33.147,35.814 32.766,36.83 48.133,39.243
  other v2: 53.764,31.328 54.864,31.328 57.064,31.328 52.664,32.428 53.764,32.428 54.864,32.428 55.964,32.428 57.064,32.428 52.664,33.528 53.764,33.528 54.864,33.528 55.964,33.528 52.664,34.628 53.764,34.628 54.864,34.628 55.964,34.628 57.064,34.628 52.664,35.728 53.764,35.728 54.864,35.728 55.964,35.728
  other v3: 47.752,33.274
NetC1.1_2: C1.1.2 Fuse.1 USBHeader.1 | length 9.8
  Top Layer 1 w0.254: USBHeader.1 30.629,30.764 32.056,32.191 32.699,32.191 v4(32.893,32.385)
  Bottom Layer 4 w0.254: Fuse.1 30.929,30.441 v4@32.873,32.385 ; C1.1.2 v4@32.873,32.385 ; v4(32.893,32.385) v4@32.873,32.385
NetC1.2_2: C1.2.2 Fuse.2 R1.5.2 R1.6.2 R2.9.2 R3.1.1 | length 9.6
  Bottom Layer 4 w0.254: Fuse.2 26.729,28.741 27.352,28.118 27.964,28.118 28.933,27.15 R1.5.2 29.72,27.147 30.732,27.147 C1.2.2 32.299,27.145 32.52,26.924 R3.1.1 ; R2.9.2@32.339,25.987 R2.9.2@32.418,25.908 ; R2.9.2 R3.1.1 ; R1.6.2 R3.1.1
NetC1.3_2: C1.3.2 C1.4.2 LDO.3 LDO.5 LDO.6 LDO.9 R1.6.1 | length 24.8
  Bottom Layer 4 w0.2: 34.06,37.846 LDO.3 ; C1.3.2 36.793,34.39 38.227,35.824 38.227,36.795 37.576,37.446 LDO.9 ; LDO.6 36.864,39.023 36.957,39.116
  Bottom Layer 4 w0.254: R1.6.1 33.52,27.94 33.693,28.113 33.693,28.138 33.913,28.358 33.913,33.267 33.913,36.461 34.06,36.608 34.06,37.846 34.06,38.313 34.863,39.116 36.864,39.116 36.957,39.116 37.502,39.116 37.916,38.702 38.016,38.702 38.264,38.454 C1.4.2 ; 34.06,32.893 35.496,32.893 36.793,34.19 C1.3.2
NetC1.5_2: C1.5.2 LDO.10 R3.3.2 R3.4.2 R3.5.2 R3.6.1 R3.7.2 R3.8.2 R3.9.2 R3.10.1 | length 30.3
  Top Layer 2 w0.2: v1(35.433,28.835) 35.433,31.369 v1(37.846,33.782) 37.846,33.863 37.592,34.117 v1(37.592,36.576) 37.599,36.569 38.142,36.569 42.707,32.004 v1(44.577,32.004)
  Bottom Layer 4 w0.2: v1(35.433,28.835) 35.433,28.779 35.179,28.525 35.179,27.236 36.068,26.347 R3.9.2 R3.8.2 R3.7.2 ; C1.5.2 36.864,35.885 LDO.10 37.114,37.046 37.584,36.576 v1(37.592,36.576) ; R3.3.2 R3.4.2 ; v1(37.846,33.782) R3.4.2 ; R3.5.2 R3.4.2 ; R3.6.1 v1(44.577,32.004) R3.10.1
NetC1.6_2: C1.6.2 HeaderSensor.2 HeaderSensor.3 LDO.8 | length 20
  Top Layer 1 w0.2: v1(49.022,32.766) v1@49.117,32.766 ; HeaderSensor.2 50.6,32.458 49.425,32.458 v1@49.117,32.766 ; HeaderSensor.3 50.6,33.058 49.409,33.058 v1@49.117,32.766
  Top Layer 2 w0.2: v1(38.862,36.703) 46.537,36.703 49.022,34.218 v1(49.022,32.766)
  Bottom Layer 4 w0.2: LDO.8 37.639,37.846 38.782,36.703 v1(38.862,36.703) C1.6.2 ; C1.6.2@39.952,36.957 C1.6.2@39.952,37.057
NetC2.1_1: C2.1.1 uC.6 | length 5.8
  Top Layer 1 w0.2: v1(58.547,36.957) 58.547,34.324 58.8,34.07 59.242,34.07 v1(59.309,34.003)
  Bottom Layer 4 w0.2: uC.6 59.069,33.528 59.242,33.702 59.242,33.936 v1(59.309,34.003) ; v1(58.547,36.957) C2.1.1
NetC2.2_2: C2.2.2 CLK.1 uC.17 | length 18.8
  Bottom Layer 4 w0.2: C2.2.2 45.716,27.743 46.576,27.743 CLK.1 47.176,28.243 47.976,27.443 50.059,27.443 50.281,27.665 51.491,27.665 53.344,25.812 56.937,25.812 57.15,26.025 57.15,27.397 55.824,28.723 55.794,28.723 54.88,29.637 54.88,30.037 uC.17
NetC2.3_2: C2.3.2 CLK.3 uC.16 | length 14.5
  Bottom Layer 4 w0.2: CLK.3 49.776,27.043 50.304,27.043 50.406,27.145 C2.3.2 52.687,25.512 57.399,25.512 57.531,25.644 57.531,27.486 55.364,29.653 uC.16
NetC2.4_2: C2.4.2 L2.1.1 uC.24 uC.44 | length 21.2
  Top Layer 2 w0.2: v1(49.879,38.894) 49.88,31.001 v1(50.546,30.335)
  Bottom Layer 4 w0.2: L2.1.1 49.077,38.091 50.325,39.339 55.563,39.339 56.231,38.672 56.513,38.672 56.543,38.642 56.543,38.359 57.121,37.781 57.339,37.563 57.339,37.442 57.354,37.426 57.354,36.899 uC.44@57.348,36.892 ; v1(50.546,30.335) 50.546,31.085 50.989,31.528 uC.24
NetC2.5_1: C2.5.1 uC.42 | length 2.1
  Bottom Layer 4 w0.2: C2.5.1 55.856,37.837 55.93,37.837 56.364,37.403 uC.42 uC.42@56.364,36.876
NetC2.6_2: C2.6.2 C2.7.2 D2.1.1 ISP.2 L2.1.2 R2.1.2 R2.6.2 R2.7.2 R2.8.2 R2.9.1 uC.2 uC.7 uC.14 uC.34 | length 110.8
  Top Layer 1 w0.2: ISP.2 v1(27.94,38.608) 28.018,38.608 28.368,38.958 31.966,38.958 33.767,37.157 34.225,37.157 34.417,36.965 D2.1.1 34.417,35.799 34.562,35.654 R2.1.2 ; v1(53.594,26.416) 54.857,26.416 55.518,27.077 56.782,27.077 57.391,27.686 57.487,27.686 v1(57.899,28.098) ; v1@57.956,28.137 57.995,28.098 58.464,28.098 58.617,27.945 59.118,27.945 59.65,28.478 59.65,32.846 59.475,33.021 v1(59.475,33.116)
  Top Layer 2 w0.2: v1(47.117,39.116) 28.448,39.116 v1(27.94,38.608) 27.94,38.094 27.585,37.739 27.585,36.175 28.575,35.184 28.575,33.155 30.809,30.921 30.809,29.48 v1(34.509,25.781) 37.922,25.781 38.557,26.416 v1(53.594,26.416)
  Bottom Layer 4 w0.2: R2.9.1 34.3,25.908 34.427,25.781 v1(34.509,25.781) ; v1(47.117,39.116) L2.1.2 ; uC.34 52.364,37.389 52.341,37.413 52.028,37.413 C2.7.2 50.846,38.367 50.846,38.1 49.677,36.931 47.787,36.931 47.117,37.601 L2.1.2 ; v1(53.594,26.416) R2.7.2 54.549,27.409 R2.6.2 ; uC.14@56.364,29.926 56.38,29.91 56.38,29.637 57.899,28.118 v1@57.899,28.113 ; v1(57.899,28.098) v1@57.899,28.113 ; C2.6.2 58.073,27.619 58.073,27.939 v1@57.899,28.113 ; uC.7 58.345,33.034 59.223,33.034 59.237,33.049 59.408,33.049 v1(59.475,33.116) ; uC.2 58.728,35.528 59.239,36.039 59.239,39.186 58.786,39.639 49.402,39.639 48.206,38.442 48.206,38.165 47.887,37.846 L2.1.2
NetC3.1_2: C3.1.2 I2CMux.14 R3.1.2 R3.2.1 | length 20.6
  Top Layer 1 w0.2: v1(42.937,27.813) 43.434,27.316 I2CMux.14 44.7,26.879 C3.1.2 ; v1(47.752,30.226) R3.2.1
  Top Layer 2 w0.2: v1(34.514,26.7) 35.099,27.285 42.511,27.285 42.652,27.427 42.652,27.433 42.937,27.718 v1(42.937,27.813) 43.572,28.448 45.974,28.448 v1(47.752,30.226)
  Bottom Layer 4 w0.2: R3.1.2 34.209,26.924 34.433,26.7 v1(34.514,26.7)
NetC3.2_1: C3.2.1 R3.6.2 Sensor0.1 | length 2.5
  Bottom Layer 4 w0.2: Sensor0.1 44.513,30.069 R3.6.2 C3.2.1
NetC3.3_1: C3.3.1 R3.10.2 Sensor1.1 | length 2.6
  Bottom Layer 4 w0.2: Sensor1.1 44.295,33.569 44.577,33.851 R3.10.2 C3.3.1
NetD2.1_2: D2.1.2 ISP.5 R2.1.1 uC.13 | length 48.5
  Top Layer 1 w0.2: D2.1.2 35.375,34.519 R2.1.1
  Top Layer 1 w0.254: v1(26.67,34.29) 29.086,34.29 30.306,35.51 30.306,36.148 ISP.5 30.873,35.929 30.873,35.578 31.932,34.519 D2.1.2
  Bottom Layer 3 w0.2: v1(26.67,34.29) 26.686,34.29 27.067,33.909 27.897,33.909 32.042,29.764 35.807,29.764 35.924,29.648 38.575,29.648 41.71,26.513 50.695,26.513 51.973,27.791 54.505,27.791 56.019,29.306 v1(57.912,29.306)
  Bottom Layer 4 w0.2: uC.13 56.88,30.037 56.88,29.637 57.377,29.14 57.485,29.249 57.855,29.249 v1(57.912,29.306)
NetHeaderLED_1: 
NetHeaderLED_2: 
NetHeaderLED_3: 
NetHeaderLED_4: 
NetHeaderSensor_1: HeaderSensor.1 R3.11.1 | length 11
  Top Layer 1 w0.2: v1(49.275,31.108) 50.65,31.108 HeaderSensor.1 ; HeaderSensor.1@50.745,31.108 HeaderSensor.1@50.768,31.131
  Top Layer 2 w0.2: v1(42.037,28.575) 42.825,28.575 45.365,31.115 49.268,31.115 v1(49.275,31.108)
  Bottom Layer 4 w0.2: R3.11.1@41.054,28.669 R3.11.1 41.829,28.702 41.956,28.575 v1(42.037,28.575)
NetHeaderSensor_4: HeaderSensor.4 R3.12.2 | length 13
  Top Layer 1 w0.2: v1(39.243,34.036) 43.64,34.036 43.859,34.255 50.797,34.255 HeaderSensor.4
  Bottom Layer 4 w0.2: R3.12.2 38.285,34.925 39.174,34.036 v1(39.243,34.036)
NetI2CMux_3: I2CMux.3 R0.4.2 R3.2.2 | length 7.7
  Top Layer 1 w0.2: I2CMux.3 40.894,31.866 41.772,30.988 R3.2.2 R0.4.2
NetI2CMux_4: I2CMux.4 R3.5.1 Sensor0.7 | length 8
  Top Layer 1 w0.1: v1(38.481,30.773) 38.481,30.865 38.735,31.12 38.735,31.318 39.007,31.591 39.349,31.591 39.624,31.866 I2CMux.4
  Bottom Layer 4 w0.1: R3.5.1 38.612,31.627 38.612,31.352 38.481,31.221 v1(38.481,30.773) 38.508,30.773 38.945,30.336 39.083,30.287 ccw(c39.243,30.734) 39.641,30.475 39.693,30.554 ccw(c39.312,30.991) 39.791,30.664 40.076,30.95 41.896,30.95 42.291,31.344 Sensor0.7 ; Sensor0.7@42.291,31.594 Sensor0.7@42.291,31.638
NetI2CMux_5: I2CMux.5 R3.4.1 Sensor0.8 | length 9.3
  Top Layer 1 w0.1: v1(37.719,30.773) 37.778,30.831 37.778,31.289 38.354,31.866 I2CMux.5
  Bottom Layer 4 w0.1: R3.4.1@37.746,31.777 37.719,31.75 37.719,30.739 38.003,30.455 38.003,30.304 38.171,30.136 39.193,30.061 ccw(c39.243,30.734) 39.804,30.358 39.85,30.427 ccw(c39.312,30.991) 39.898,30.477 39.983,30.574 40.159,30.75 42.496,30.75 43.091,31.344 Sensor0.8
  Bottom Layer 4 w0.2: R3.4.1@37.746,31.777 R3.4.1
NetI2CMux_6: I2CMux.6 R3.3.1 Sensor0.2 | length 9.1
  Top Layer 1 w0.1: v1(36.83,30.773) 36.83,30.866 37.084,31.12 I2CMux.6
  Bottom Layer 4 w0.1: R3.3.1 36.83,30.694 37.587,29.936 39.202,29.86 ccw(c39.243,30.734) 39.941,30.206 40.033,30.329 40.183,30.491 40.241,30.55 41.897,30.55 42.291,30.156 Sensor0.2
NetI2CMux_8: I2CMux.8 R3.9.1 Sensor1.7 | length 23.6
  Top Layer 1 w0.1: I2CMux.8 35.99,27.055 v1(35.99,28.411)
  Bottom Layer 4 w0.1: v1(35.99,28.411) v1@36.068,28.333 ; R3.9.1 35.99,27.35 35.99,28.254 v1@36.068,28.333 ; Sensor1.7 42.291,34.844 42.685,34.45 46.252,34.45 46.355,34.347 46.355,29.874 44.781,28.3 44.752,28.271 44.669,28.271 42.942,28.288 ccw(c42.937,27.813) 42.905,28.287 42.675,28.271 42.645,28.242 42.171,27.767 40.093,27.767 38.793,29.067 37.055,29.067 36.465,28.477 36.198,28.477 36.068,28.348 v1@36.068,28.333
NetI2CMux_9: I2CMux.9 R3.8.1 Sensor1.8 | length 22.7
  Top Layer 1 w0.1: I2CMux.9 37.159,26.954 v1(37.159,28.5)
  Bottom Layer 4 w0.1: R3.8.1 37.338,28.001 37.245,28.094 37.245,28.414 v1(37.159,28.5) 37.526,28.867 38.71,28.867 40.105,27.472 41.555,27.472 41.864,27.163 43.927,27.163 46.609,29.845 46.609,34.446 46.404,34.65 43.285,34.65 43.091,34.844 Sensor1.8
NetI2CMux_10: I2CMux.10 R3.7.1 Sensor1.2 | length 24.4
  Top Layer 1 w0.1: I2CMux.10 38.481,27.006 v1(38.481,28.392)
  Bottom Layer 4 w0.1: v1(38.481,28.392) 38.481,27.399 R3.7.1 41.279,27.272 41.588,26.963 44.01,26.963 46.809,29.762 46.809,34.598 46.082,35.325 41.985,35.325 41.897,35.238 41.897,34.538 42.097,34.338 42.097,33.806 Sensor1.2 ; Sensor1.2@42.097,33.556 Sensor1.2@42.291,33.362
NetI2CMux_11: I2CMux.11 R0.3.2 | length 7.7
  Top Layer 1 w0.2: I2CMux.11 39.624,27.316 42.28,29.972 R0.3.2
NetI2CMux_12: I2CMux.12 R0.2.2 | length 6.1
  Top Layer 1 w0.2: I2CMux.12 40.894,26.441 41.554,25.781 44.618,25.781 45.761,26.924 R0.2.2
NetI2CMux_13: I2CMux.13 R0.1.2 | length 5.5
  Top Layer 1 w0.2: I2CMux.13@42.164,27.316 I2CMux.13 42.389,27.104 42.389,28.038 43.403,29.052 44.515,29.052 44.611,28.956 R0.1.2
NetISP_1: ISP.1 uC.11 | length 39.4
  Top Layer 1 w0.2: v1(26.543,35.306) 26.6,35.363 26.981,35.363 ISP.1
  Bottom Layer 3 w0.2: v1(26.543,35.306) 27.64,34.209 28.021,34.209 32.166,30.064 35.932,30.064 36.048,29.948 38.759,29.948 41.894,26.813 50.57,26.813 51.849,28.091 54.38,28.091 56.338,30.049 v1(58.039,30.049)
  Bottom Layer 4 w0.2: v1(58.039,30.049) 58.039,31.005 58.062,31.028 uC.11
NetISP_3: ISP.3 uC.9 | length 49.3
  Top Layer 1 w0.2: v1(29.21,35.306) ISP.3
  Bottom Layer 3 w0.2: v1(29.21,35.306) 27.963,35.306 27.162,36.107 26.318,36.107 25.4,35.189 25.4,32.385 28.321,29.464 35.683,29.464 35.799,29.348 38.343,29.348 41.529,26.162 50.78,26.162 52.109,27.491 54.629,27.491 55.84,28.702 58.166,28.702 v1(58.801,29.337)
  Bottom Layer 4 w0.2: uC.9 58.739,32.028 59.405,31.362 59.405,29.941 v1(58.801,29.337)
NetISP_4: ISP.4 uC.10 | length 41
  Top Layer 1 w0.2: ISP.4 29.21,37.719 v1(29.845,38.354)
  Bottom Layer 3 w0.2: v1(29.845,38.354) 29.926,38.354 30.266,38.014 30.559,38.014 30.861,37.712 30.861,32.385 32.882,30.364 36.056,30.364 36.172,30.248 38.967,30.248 42.102,27.113 50.446,27.113 51.725,28.391 54.172,28.391 56.434,30.653 58.372,30.653 58.626,30.399 v1(58.707,30.399)
  Bottom Layer 4 w0.2: uC.10 58.355,31.512 58.755,31.512 59.064,31.203 59.064,30.82 58.707,30.463 v1(58.707,30.399)
NetLEDGreen_2: LEDGreen.2 R2.3.1 | length 6.5
  Top Layer 1 w0.2: LEDGreen.2 41.579,35.203 43.121,36.745 R2.3.1
NetLEDPWR_2: LEDPWR.2 R2.8.1 | length 2.8
  Top Layer 1 w0.2: R2.8.1 35.425,36.957 36.579,35.803 36.865,35.803 LEDPWR.2
NetLEDRed_2: LEDRed.2 R2.4.1 | length 4.4
  Top Layer 1 w0.2: LEDRed.2 43.611,35.203 44.511,36.103 46.426,36.103 46.757,35.772 R2.4.1
NetLEDRx_2: LEDRx.2 R2.2.2 | length 9
  Top Layer 1 w0.2: LEDRx.2 39.547,35.203 41.389,37.045 46.168,37.045 46.619,37.496 46.619,37.526 46.812,37.719 R2.2.2
NetLEDTx_2: LEDTx.2 R2.5.1 | length 2
  Top Layer 1 w0.2: LEDTx.2 45.998,34.798 R2.5.1
NetR0.1_1: R0.1.1 R2.6.1 uC.19 | length 11.2
  Top Layer 1 w0.2: R0.1.1 46.761,28.956 47.396,28.321 49.02,28.321 49.095,28.395 v1(50.8,28.395)
  Bottom Layer 4 w0.2: v1(50.8,28.395) 52.327,28.395 52.402,28.321 53.848,28.321 ; uC.19 53.864,28.337 53.848,28.321 ; R2.6.1 55.497,27.432 54.608,28.321 53.848,28.321
NetR0.2_1: R0.2.1 R2.7.1 uC.18 | length 15.9
  Top Layer 1 w0.2: R0.2.1 46.761,26.924 47.873,25.812 55.797,25.812 v1(56.458,26.473)
  Bottom Layer 4 w0.2: uC.18 54.364,29.653 56.458,27.559 v1(56.458,26.473) 55.556,26.473 R2.7.1
NetR0.3_1: R0.3.1 uC.20 | length 7.9
  Top Layer 1 w0.2: R0.3.1 46.761,29.972 47.238,29.495 48.429,29.495 48.606,29.672 v1(48.687,29.672)
  Bottom Layer 4 w0.2: v1(48.687,29.672) 48.733,29.718 49.395,29.718 50.085,29.028 52.623,29.028 52.688,29.093 52.715,29.093 52.95,29.328 52.999,29.328 53.064,29.393 53.09,29.393 53.364,29.667 uC.20
NetR0.4_1: R0.4.1 uC.21 | length 7.3
  Top Layer 1 w0.2: R0.4.1 48.433,32.004 48.56,31.877 v1(48.641,31.877)
  Bottom Layer 4 w0.2: v1(48.641,31.877) 48.641,30.896 50.209,29.328 52.499,29.328 52.564,29.393 52.59,29.393 52.864,29.667 uC.21
NetR1.3_1: R1.3.1 RV1.2.1 USBHeader.3 | length 5.8
  Top Layer 1 w0.254: USBHeader.3 31.242,29.464 31.496,29.21 31.496,28.32 32.258,27.558 RV1.2.1 32.32,27.366 R1.3.1
NetR1.3_2: R1.3.2 uC.4 | length 34.5
  Top Layer 1 w0.2: R1.3.2 33.401,26.441 34.798,27.838 v1(34.798,31.369)
  Bottom Layer 3 w0.2: v1(34.798,31.369) 35.97,32.541 41.558,32.541 46.451,37.434 56.573,37.434 v1(59.303,34.703)
  Bottom Layer 4 w0.2: uC.4 v1@59.116,34.528
NetR1.4_1: R1.4.1 RV1.1.1 USBHeader.2 | length 4.7
  Top Layer 1 w0.254: USBHeader.2 31.611,30.114 32.258,29.467 RV1.1.1 R1.4.1
NetR1.4_2: R1.4.2 uC.3 | length 31.5
  Top Layer 1 w0.2: R1.4.2 33.401,30.861 v1(34.798,32.258)
  Bottom Layer 3 w0.2: v1(34.798,32.258) 35.525,32.985 41.24,32.985 45.989,37.734 57.012,37.734 59.343,35.403 v1(59.346,35.403)
  Bottom Layer 4 w0.2: uC.3 58.753,35.028 59.061,35.336 59.279,35.336 v1(59.346,35.403)
NetR2.2_1: R2.2.1 uC.8 | length 24.3
  Top Layer 1 w0.2: R2.2.1 49.784,37.719 50.673,36.83 v1(50.673,36.805)
  Top Layer 2 w0.2: v1(50.673,36.805) 50.673,31.062 51.451,30.284 51.451,29.405 53.362,27.494 58.149,27.494 59.326,28.671 59.326,30.667 59.125,30.868 v1(59.125,32.509)
  Bottom Layer 4 w0.2: uC.8 58.348,32.519 59.116,32.519 v1(59.125,32.509)
NetR2.3_2: R2.3.2 uC.32 | length 3.6
  Top Layer 1 w0.2: R2.3.2 48.587,36.545 48.976,36.545 49.195,36.327 v1(49.276,36.327)
  Bottom Layer 4 w0.2: v1(49.276,36.327) 49.333,36.384 49.793,36.384 49.863,36.454 50.063,36.454 50.989,35.528 uC.32
NetR2.4_2: R2.4.2 uC.27 | length 4.7
  Top Layer 1 w0.2: R2.4.2 48.586,35.573 v1(49.275,35.573)
  Bottom Layer 4 w0.2: v1(49.275,35.573) 49.319,35.529 49.526,35.529 50.156,34.899 50.156,33.861 50.989,33.028 uC.27
NetR2.5_2: R2.5.2 uC.22 | length 8.8
  Top Layer 1 w0.2: R2.5.2 48.514,34.925 48.514,34.917 48.612,34.819 v1(49.275,34.819)
  Bottom Layer 4 w0.2: v1(49.275,34.819) 49.297,34.798 49.53,34.798 49.856,34.472 49.856,33.736 49.88,33.713 49.88,30.147 50.296,29.731 50.809,29.731 51.131,30.053 uC.22
NetR3.11_2: R3.11.2 Sensor0.4 | length 1.7
  Bottom Layer 4 w0.2: R3.11.2 40.071,29.449 40.691,30.069 Sensor0.4
NetR3.12_1: R3.12.1 Sensor1.4 | length 2
  Bottom Layer 4 w0.2: R3.12.1@39.235,34.925 39.435,34.725 39.622,34.725 40.691,33.656 Sensor1.4
pads on no net: HeaderSensor.5 HeaderSensor.6 ISP. LDO.1 LDO.7 Sensor0.6 Sensor1.6 uC.1 uC.12 uC.25 uC.26 uC.28 uC.29 uC.30 uC.31 uC.33 uC.36 uC.37 uC.38 uC.39 uC.40 uC.41 USBHeader.4
copper on no net:
  other v1: 35.941,30.861

## Polygon pours and split planes (outlines as drawn)
GND on Top Layer 2 "GND_L02_P000" (solid, remove dead copper, pour order 0): 25,40 60,40 60,25 25,25
GND on Bottom Layer 3 "GND_L03_P002" (solid, remove dead copper, pour order 2): 25,40 60,40 60,25 25,25
GND on Bottom Layer 4 "GND_L04_P003" (solid, remove dead copper, pour order 3): 25,40 60,40 60,25 25,25
GND on Top Layer 1 "GND_L01_P001" (solid, remove dead copper, pour order 1): 25,40 60,40 60,25 25,25

## Silkscreen, mask and mechanical layers (free items; w line width, h text height)
Mechanical 15:
  the board outline again, w0.254

## Text inside footprints (layer, text, board x,y; h text height)
CLK: Bottom Overlay "1" at 46.355,29.337 h0.5